# Altium PCB SENSEI_Base-Board.PcbDoc (part 2 of 10)
Units mm, origin at the board's own origin, x right, y up, seen from the top; angles counter-clockwise.
Board outline 51.6 x 28.1 mm, 8 copper layers (Top Sig/Pwr, GND1, Sig1, GND2, Sig2, Pwr, GND3, Bot Sig/Pwr), stack 1.53 mm thick; 209 components, 201 nets, 1031 pads, 2222 vias.
Unrouted connection lines stored in the file: 214.
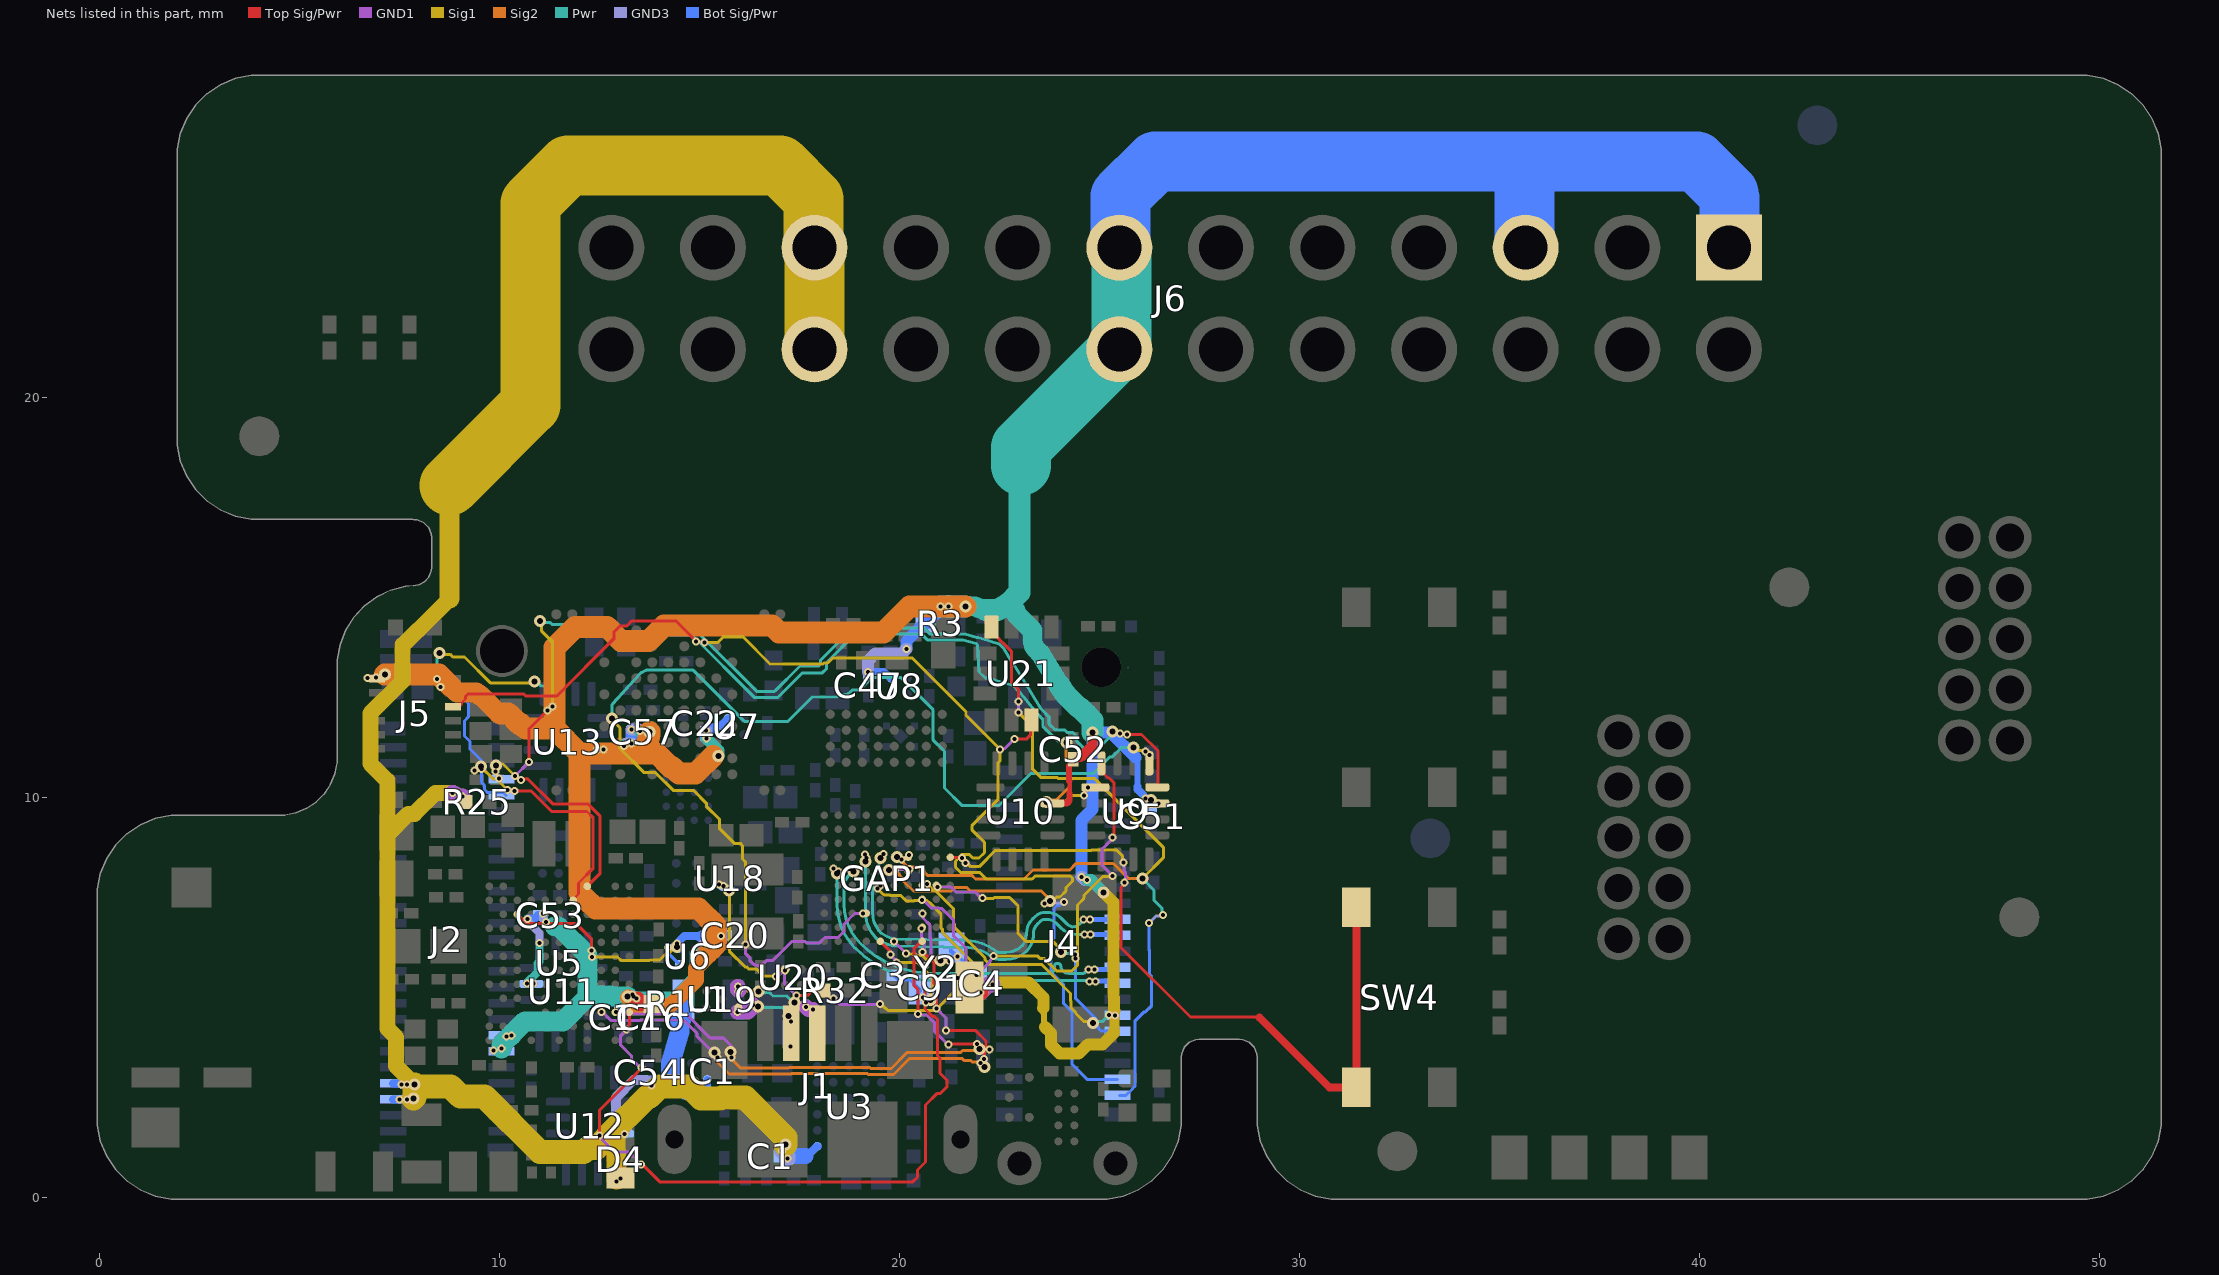
[diagram p8: the nets of this part, all layers, seen from the top]

## Footprints (in the part's own frame and the unit in brackets; to place one, negate y for a bottom-side part, rotate by r counter-clockwise, add the part's x,y. Pads: shape width x height; smd on the part's side, far side on the other; paste and mask are expansions set on the pad) (continued)
RESC0603X28X15LL05T05 [mm] "Chip Resistor, 2-Leads, Body 0.60x0.30mm, IPC High Density"
  rect 0.35x0.25 smd: 1(-0.275,0) 2(0.275,0)
  body extent -0.33,-0.17 0.32,0.18, height 0.28
RESC0603X28X15ML05T05 [mm] "Chip Resistor, 2-Leads, Body 0.60x0.30mm, IPC Low Density"
  rect 0.55x0.45 smd: 1(-0.375,0) 2(0.375,0)
  body extent -0.33,-0.17 0.33,0.18, height 0.28
RESC0603X28X15NL05T05 [mm] "Chip Resistor, 2-Leads, Body 0.60x0.30mm, IPC Medium Density"
  rect 0.45x0.35 smd: 1(-0.325,0) 2(0.325,0)
  body extent -0.33,-0.17 0.33,0.18, height 0.28
RESC1005X40X25LL05T10 [mm] "Chip Resistor, 2-Leads, Body 1.00x0.50mm, IPC High Density"
  rect 0.5x0.45 smd: 1(-0.375,0) 2(0.375,0)
  body extent -0.53,-0.27 0.53,0.28, height 0.4
RESC1608X55X30ML20T10 [mm] "Chip Resistor, 2-Leads, Body 1.60x0.80mm, IPC Low Density"
  rect 0.9x1.1 smd: 1(-0.75,0) 2(0.75,0)
  body extent -0.9,-0.5 0.9,0.5, height 0.55
SHDR24W64P254_2X12_3808X880X910P [mm]
  rect 1.65x1.65 hole 1.1: 1(0,0)
  round 1.65 hole 1.1: 2(0,2.54) 3(2.54,0) 4(2.54,2.54) 5(5.08,0) 6(5.08,2.54) 7(7.62,0) 8(7.62,2.54) 9(10.16,0) 10(10.16,2.54) 11(12.7,0) 12(12.7,2.54) 13(15.24,0) 14(15.24,2.54) 15(17.78,0) 16(17.78,2.54) 17(20.32,0) 18(20.32,2.54) 19(22.86,0) 20(22.86,2.54) 21(25.4,0) 22(25.4,2.54) 23(27.94,0) 24(27.94,2.54)
  body extent -5.07,-3.13 33.01,5.67, height 9.1
SML-LX0404SIUPGUSB [mm]
  rrect50% 0.45x0.45 smd: 1(-0.425,0.425)
  rect 0.45x0.45 smd: 2(0.425,0.425) 3(0.425,-0.425) 4(-0.425,-0.425)
  body extent -0.5,-0.5 0.5,0.5, height 0.25
SOT1226-3 [mm]
  rect 0.18x0.18 smd paste+0 mask+0: 1(-0.26,-0.35) 2(0.26,-0.35) 4(0.26,0.35) 5(-0.26,0.35)
  rect 0.28x0.28 smd rot 45 paste+0 mask+0: 3(0,0)
  Top Sig/Pwr region: 0.38,-0.48 0.38,-0.16 0.265,-0.16 0.12,-0.305 0.12,-0.48
  Top Sig/Pwr region: -0.38,0.48 -0.38,0.16 -0.265,0.16 -0.12,0.305 -0.12,0.48
  Top Sig/Pwr region: -0.38,-0.48 -0.38,-0.16 -0.265,-0.16 -0.12,-0.305 -0.12,-0.48
  Top Sig/Pwr region: 0.38,0.48 0.38,0.16 0.265,0.16 0.12,0.305 0.12,0.48
  body extent -0.4,-0.4 0.4,0.4, height 0.37
"SW4_PTS815 SJM 250 SMTR LFS_CNK" [mm]
  rect 0.991x0.711 smd paste+0 mask+0: 1(-2.25,1.075) 2(2.25,1.075) 3(-2.25,-1.075) 4(2.25,-1.075)
  silkscreen extent -2.32,-1.83 2.32,1.83, body extent -2.25,-1.6 2.25,1.6, height 2.51
TPD1E01B04DPYRQ1 [mm]
  rect 0.3x0.5 smd: 1(-0.35,0) 2(0.35,0)
  body extent -0.5,-0.3 0.5,0.3, height 0.55
TPP [mm]
  round 1 smd: 0(0,0)
WLCSP32_APS512XXN-OB9-WB [mm]
  round 0.23 smd mask-0.02: A1(-1.4,0.6) A2(-1,0.6) A3(-0.6,0.6) A4(-0.2,0.6) A5(0.2,0.6) A6(0.6,0.6) A7(1,0.6) A8(1.4,0.6) B1(-1.4,0.2) B2(-1,0.2) B3(-0.6,0.2) B4(-0.2,0.2) B5(0.2,0.2) B6(0.6,0.2) B7(1,0.2) B8(1.4,0.2) C1(-1.4,-0.2) C2(-1,-0.2) C3(-0.6,-0.2) C4(-0.2,-0.2) C5(0.2,-0.2) C6(0.6,-0.2) C7(1,-0.2) C8(1.4,-0.2) D1(-1.4,-0.6) D2(-1,-0.6) D3(-0.6,-0.6) D4(-0.2,-0.6) D5(0.2,-0.6) D6(0.6,-0.6) D7(1,-0.6) D8(1.4,-0.6)
  silkscreen extent -1.9,-1.4 1.9,1.4, body extent -1.85,-1.34 1.88,1.39, height 0.51
WLCSP_5_2-1-2_P0.4 [mm]
  round 0.2 smd paste+0 mask+0: A1(-0.4,-0.2) A2(-0.4,0.2) B1(0,0) C1(0.4,-0.2) C2(0.4,0.2)
  body extent -0.6,-0.38 0.6,0.38, height 0.57
WLCSP_8_P0.4 [mm]
  round 0.2 smd mask+0: A1(0,0) A2(0.4,0) B1(0,-0.4) B2(0.4,-0.4) C1(0,-0.8) C2(0.4,-0.8) D1(0,-1.2) D2(0.4,-1.2)
  body extent -0.3,-1.4 0.7,0.2, height 0.41
WLP_30_MAX77654 [mm]
  round 0.22 smd paste+0 mask+0: A1(0,0) A2(0.4,0) A3(0.8,0) A4(1.2,0) A5(1.6,0) A6(2,0) B1(0,-0.4) B2(0.4,-0.4) B3(0.8,-0.4) B4(1.2,-0.4) B5(1.6,-0.4) B6(2,-0.4) C1(0,-0.8) C2(0.4,-0.8) C3(0.8,-0.8) C4(1.2,-0.8) C5(1.6,-0.8) C6(2,-0.8) D1(0,-1.2) D2(0.4,-1.2) D3(0.8,-1.2) D4(1.2,-1.2) D5(1.6,-1.2) D6(2,-1.2) E1(0,-1.6) E2(0.4,-1.6) E3(0.8,-1.6) E4(1.2,-1.6) E5(1.6,-1.6) E6(2,-1.6)
  body extent -0.4,-1.97 2.4,0.37, height 0.51
XTAL_ECS-240-10-47Q-CES-TR [mm]
  rect 0.75x0.65 smd: 1(-0.525,-0.375) 2(0.525,-0.375) 3(0.525,0.375) 4(-0.525,0.375)
  body extent -0.8,-0.6 0.8,0.6, height 0.41
Y_ECX-1048 [mm]
  rect 0.52x0.47 smd: 1(-0.41,-0.335) 2(0.41,-0.335) 3(0.41,0.335) 4(-0.41,0.335)
  body extent -0.6,-0.5 0.6,0.5, height 0.3

## Part data
C1 C2: library part CMP-06035-019701-1, "Chip Multilayer Ceramic Capacitors for General Purpose, 0201, 4.7uF, X5R, 15%, 20%, 6.3V", Capacitance=4.7uF, Case Code (Imperial)=0201, Case Code (Metric)=0603, Dielectric=X5R, Max Operating Temperature=85°C, Min Operating Temperature=-55°C, Tolerance=20%, Voltage Rating=6.3V, Case/Package=0201, Length=0.024inch, Mount="Surface Mount", Packaging="Tape and Reel", Thickness=0.022inch, Voltage Rating (DC)=6.3V, Width=0.012inch
C3 C4: "No Description Available", Capacitance=20pF, Mfr_Name=Kemet, Copyright="Copyright (C) 2022 Ultra Librarian. All rights reserved.", Manufacturer_Part_Number=CBR02C200F5GAC, RefDes=RefDes, Type=DEV
C5 C6 C7 C12 C18 C20 C22 C23 C47 C51 C52 C53 C54 C57 C64 C65 C69 C70 C74 C84 C92 C95 C97: library part CMP-13271-003594-1, "Cap Ceramic 1uF 10V X5R ±10% Pad SMD 0201 +85°C T/R", Capacitance=1uF, Case Code (Imperial)=0201, Case Code (Metric)=0603, Max Operating Temperature=85°C, Min Operating Temperature=-55°C, Tolerance=10%, Voltage Rating=10V, Case/Package=0201, Length=0.024inch, Mount="Surface Mount", Packaging="Cut Tape", Thickness=0.013inch, Width=0.012inch
C8 C10 C24 C49 C55: library part CMP-2000-05437-2, "CAP CER 4.7UF 6.3V X5R 0402", Capacitance=4.7uF, Case/Package=0402, Dielectric=X5R, Dielectric Material=Ceramic, Max Operating Temperature=85°C, Min Operating Temperature=-55°C, Tolerance=10%, Voltage=6.3V, Depth=0.5mm, Height=0.5mm, Lead Free="Lead Free", Length=1mm, Mount="Surface Mount", RoHS Compliant=Yes, Series=C, Termination=SMD/SMT
C9 C11 C19 C21 C25 C26 C27 C28 C29 C30 C31 C33 C34 C35 C36 C37 C38 C39 C48 C50 C56 C58 C60 C61 C73 C75 C76 C77 C78 C79 C80 C81 C82 C85 C86 C88 C89 C90 C94 C96 C98 C99: library part CMP-06035-035508-1, "Chip Multilayer Ceramic Capacitors for General Purpose, 0201, 0.10uF, X7R, 15%, 10%, 16V", Capacitance=0.1uF, Case/Package=0201
C13 C14: library part CMP-06035-032992-1, "Chip Multilayer Ceramic Capacitors for General Purpose, 0201, 2.2uF, X5R, 15%, 10%, 10V", Capacitance=2.2uF, Case Code (Imperial)=0201, Case Code (Metric)=0603, Dielectric=X5R, Max Operating Temperature=85°C, Min Operating Temperature=-55°C, Tolerance=10%, Voltage Rating=10V, Case/Package=0201, Length=0.024inch, Mount="Surface Mount", Packaging="Tape and Reel", Thickness=0.015inch, Voltage Rating (DC)=10V, Width=0.012inch
C15 C16 C17 C40 C41 C42 C43: library part CMP-13271-000286-1, "Cap Ceramic 22uF 6.3V X5R ±20% SMD 0402 +85°C Paper T/R", Capacitance=22uF, Case Code (Imperial)=0402, Case Code (Metric)=1005, Max Operating Temperature=85°C, Min Operating Temperature=-55°C, Tolerance=20%, Voltage Rating=6.3V, Case/Package=0402, Length=0.039inch, Mount="Surface Mount", Packaging="Tape and Reel", Thickness=0.022inch, Width=0.02inch
C32 C44 C59 C83 C87: library part CMP-13271-000002-1, "CAP CER 10UF 10V X5R 0402", Capacitance=10uF, Manufacturer=Samsung, Temperature="-55°C to +85°C", Temperature Characteristic=X5R, Temperature Coefficient=15%, Temperature Range High=+85°C, Temperature Range Low=-55°C, Tolerance=20%, Voltage Rating=10V, Automotive=No, Category=Cap, ComponentLink2Description=Datasheet, ComponentLink2URL=http://www.samsungsem.com/kr/support/product-search/mlcc/__icsFiles/afieldfile/2019/05/10/19-CL05A106MP5NUNC.pdf, Device Class L1="Passive Components", Device Class L2=Capacitors, Device Class L3="Ceramic Capacitors", Digikey Description="CAP CER 10UF 10V X5R 0402", Height=0.7mm, Ipc Land Pattern Name=CAPC10050X50, Lead Free=Yes, Manufacturer Part Number=CL05A106MP5NUNC, Material=Ceramic, Octopart=https://octopart.com/cl05a106mp5nunc-samsung-22457395, Package=CL05A106MP5NUNC, RoHS=TRUE
C46: library part CMP-06035-035563-1, "Chip Multilayer Ceramic Capacitors for General Purpose, 0201, 3300pF, X7R, 15%, 10%, 25V", Capacitance=3.3nF, Case Code (Imperial)=0201, Case Code (Metric)=0603, Dielectric=X7R, Max Operating Temperature=125°C, Min Operating Temperature=-55°C, Package Quantity=15000, Resistor Type=Ceramic, Tolerance=10%, Voltage Rating=25V, Case/Package=0201, Height=0.3mm, Length=0.024inch, Mount="Surface Mount", Packaging="Tape and Reel", Termination=SMD/SMT, Thickness=0.013inch, Voltage Rating (DC)=25V, Weight=1.2E-05oz, Width=0.012inch
C62 C63: library part CMP-06035-019132-1, "Chip Multilayer Ceramic Capacitors for General Purpose, 0201, 110pF, C0G, 30ppm/°C, 5%, 50V", Capacitance=110pF, Case Code (Imperial)=0201, Case Code (Metric)=0603, Dielectric=C0G, Max Operating Temperature=125°C, Min Operating Temperature=-55°C, Package Quantity=1, Tolerance=5%, Voltage Rating=50V, Case/Package=0201, Height=0.3mm, Length=0.024inch, Mount="Surface Mount", Packaging="Tape and Reel", Termination=SMD/SMT, Thickness=0.013inch, Voltage Rating (DC)=50V, Weight=1.2E-05oz, Width=0.3mm
C66: library part CMP-2010-01694-2, "Chip Multilayer Ceramic Capacitors for General Purpose, 0201, 2200pF, X7R, 15%, 10%, 16V", Capacitance=2.2nF, Case Code (Imperial)=0201, Case Code (Metric)=0603, Dielectric=X7R, Max Operating Temperature=125°C, Min Operating Temperature=-55°C, Package Quantity=1, Tolerance=10%, Voltage=16V, Case/Package=0201, Depth=0.3mm, Height=0.3mm, Lead Free="Lead Free", Length=0.6mm, Material=Ceramic, Mount="Surface Mount", Packaging="Tape and Reel", Radiation Hardening=No, REACH SVHC="No SVHC", Termination=SMD/SMT, Thickness=0.013inch, Voltage Rating=16V, Voltage Rating (DC)=16V, Width=0.012inch
C67: library part CMP-2010-00919-2, "Ceramic Capacitor 0.7pF ±0.1pF 25V C0G 0201 (0603 Metric)", Capacitance=0.7pF, Case Code (Imperial)=0201, Case Code (Metric)=0603, Dielectric=C0G, Max Operating Temperature=125°C, Min Operating Temperature=-55°C, Package Quantity=15000, Voltage Rating=25V, Case/Package=0201, Depth=0.3mm, Height=0.3mm, Lead Free="Lead Free", Length=0.6mm, Mount="Surface Mount", Packaging="Tape and Reel", Radiation Hardening=No, Termination=SMD/SMT, Thickness=0.013inch, Voltage Rating (DC)=25V, Width=0.012inch
C68: library part CMP-06035-035508-1, Case/Package=0201, Capacitance=DNF
C71 C72: library part CMP-2000-05437-2, "CAP CER 4.7UF 6.3V X5R 0402 10%", Capacitance=4.7uF, Case/Package=0402, Dielectric=X5R, Dielectric Material=Ceramic, Max Operating Temperature=85°C, Min Operating Temperature=-55°C, Tolerance=10%, Voltage=6.3V, Depth=0.5mm, Height=0.5mm, Lead Free="Lead Free", Length=1mm, Mount="Surface Mount", RoHS Compliant=Yes, Series=C, Termination=SMD/SMT
C91: library part CMP-06035-033356-1, "Chip Multilayer Ceramic Capacitors for General Purpose, 0805, 100uF, X5R, 15%, 20%, 4V", Capacitance=100uF, Case Code (Imperial)=0805, Case Code (Metric)=2012, Dielectric=X5R, Max Operating Temperature=85°C, Min Operating Temperature=-55°C, Tolerance=20%, Voltage Rating=4V, Case/Package=0805, Length=0.079inch, Mount="Surface Mount", Packaging="Tape and Reel", Thickness=0.057inch, Voltage Rating (DC)=4V, Width=0.049inch
D1: library part D_RGB_LED, "SML-LX0404SIUPGUSB RGB LED", Manufacturer=Lumex, Supplier Part Number 1=696-LX0404SIUPGUSB, Manufacturer Part Number=SML-LX0404SIUPGUSB, Supplier 1=Mouser
D2 D3: "TVS Diode (Bi-directional)", Manufacturer_Name="Texas Instruments", Mouser Part Number=595-TPD1E01B04DPYRQ1, Arrow Part Number=TPD1E01B04DPYRQ1, Arrow Price/Stock=https://www.arrow.com/en/products/tpd1e01b04dpyrq1/texas-instruments?region=nac, Datasheet Link=https://www.ti.com/lit/ds/symlink/tpd1e01b04-q1.pdf?ts=1677834076075&ref_url=https%253A%252F%252Fwww.ti.com%252Fproduct%252FTPD1E01B04-Q1%252Fpart-details%252FTPD1E01B04DPYRQ1, Height=0.45mm, Manufacturer_Part_Number=TPD1E01B04DPYRQ1, Mouser Price/Stock=https://www.mouser.co.uk/ProductDetail/Texas-Instruments/TPD1E01B04DPYRQ1?qs=doiCPypUmgEwTnvBpZhkOw%3D%3D
D4: library part CMP-1055-00233-1, "Schottky Barrier Diode, 2-Pin DSN, Pb-Free, Tape and Reel", Manufacturer="On Semiconductor", ComponentLink1Description="Manufacturer URL", ComponentLink1URL=http://www.onsemi.com/, ComponentLink2Description=Datasheet, ComponentLink2URL=http://www.onsemi.com/pub_link/Collateral/NSR20F30-D.PDF, ComponentLink3Description="Package Specification", ComponentLink3URL=http://www.onsemi.cn/pub_link/Collateral/152AB.PDF, Configuration=Single, DatasheetVersion="Rev. 3", IFSM Max (A)=28, Mounting Technology="Surface Mount", PackageDescription="2-Pin Micro Molded Package, Body 1.6 x 0.8 mm", PackageReference=DSN-2-512AB-01, PackageVersion="Rev. B, 01/2011", Packing="Tape and Reel", PartNumber=NSR20F30NXT5G, RoHS=TRUE
E1: "Integrated Chip Antenna", Manufacturer="Fractus Antennas", Supplier Part Number 1=128-NN03-320, Manufacturer Part Number=NN03-320, Supplier 1=Mouser
IC1: library part MAX38643AENT+, "Integrated Circuit", Manufacturer_Name="Analog Devices", Mouser Part Number=700-MAX38643AENT+, Datasheet Link=https://www.mouser.com/datasheet/2/256/MAX38640A-MAX38643B-1516623.pdf, Height=0.5mm, Manufacturer_Part_Number=MAX38643AENT+, Mouser Price/Stock=https://www.mouser.co.uk/ProductDetail/Maxim-Integrated/MAX38643AENT%2b?qs=PzGy0jfpSMssjCGgbzOt4w%3D%3D
IC2: "Integrated Circuit", Manufacturer_Name="Texas Instruments", Mouser Part Number=595-TS5A3153YZPR, Datasheet Link=http://www.ti.com/lit/gpn/ts5a3153, Height=0.5mm, Manufacturer_Part_Number=TS5A3153YZPR, Mouser Price/Stock=https://www.mouser.co.uk/ProductDetail/Texas-Instruments/TS5A3153YZPR?qs=BBezV1N05%2FtCq%2FSrTOTYog%3D%3D
IC3: "Integrated Circuit", Manufacturer_Name="Texas Instruments", Mouser Part Number=595-TS5A3167YZPR, Arrow Part Number=TS5A3167YZPR, Arrow Price/Stock=https://www.arrow.com/en/products/ts5a3167yzpr/texas-instruments, Datasheet Link=http://www.ti.com/lit/gpn/ts5a3167, Height=0.5mm, Manufacturer_Part_Number=TS5A3167YZPR, Mouser Price/Stock=https://www.mouser.co.uk/ProductDetail/Texas-Instruments/TS5A3167YZPR/?qs=0O%2FZFlpUpJV2gM0iE3NeCQ%3D%3D
J1: "No Description Available", Mfr_Name="Global Connector Technology", Copyright="Copyright (C) 2023 Ultra Librarian. All rights reserved.", Manufacturer_Part_Number=USB3076-30-A, RefDes=RefDes, Type=DEV
J2: library part CONN_50P_M_COMBI_INTERFACE, "50Pin 0.4mm pitch connector footprint that accepts (male) connectors intended for different stacking heights: / Hirose - DF40C-50DP-0.4V(51) for 1.5mm - 3mm stacking height / JAE - WP7B-P050VA1-R8000 - for 0.7mm stacking height"
J3 J7: "Connector", Manufacturer_Name="CNC Tech", Arrow Part Number=3220-10-0100-00, Arrow Price/Stock=https://www.arrow.com/en/products/3220-10-0100-00/cnc-tech-llc?region=nac, Datasheet Link=https://datasheet.datasheetarchive.com/originals/dk/DKDS-7/133059.pdf, Height=5.6mm, Manufacturer_Part_Number=3220-10-0100-00
J4: "CONN PLUG 40POS SMD GOLD", Current Rating=300mA, Max Operating Temperature=85°C, Min Operating Temperature=-35°C, Package Quantity=1, Voltage Rating=30V, Connector Type=Plug, Contact Material=Bronze, Contact Plating=Gold, Gender=Male, Housing Material=Polymer, Lead Free="Lead Free", Mated Stacking Heights=4mm, Mount="Surface Mount", Number of Contacts=40, Number of Positions=40, Number of Rows=2, Orientation=Straight, Packaging="Tape and Reel", Pitch=0.4mm, REACH SVHC="No SVHC", Termination=SMD/SMT
J5: "Connector", Manufacturer_Name=Molex, Mouser Part Number=538-505066-1222, Datasheet Link=https://www.molex.com/pdm_docs/sd/5050661222_sd.pdf, Height=0.63mm, Manufacturer_Part_Number=505066-1222, Mouser Price/Stock=https://www.mouser.co.uk/ProductDetail/Molex/505066-1222?qs=byeeYqUIh0OlQo7UKX%2FsWw%3D%3D
J6: "Connector", Manufacturer_Name="Adam Tech", Arrow Part Number=BHR-24-VUA, Arrow Price/Stock=https://www.arrow.com/en/products/bhr-24-vua/adam-tech, Datasheet Link=https://datasheet.datasheetarchive.com/originals/distributors/Datasheets_SAMA/695a8166aa40898d0a6b5857fa89f6fe.pdf, Height=9.1mm, Manufacturer_Part_Number=BHR-24-VUA
J8: library part DF52-2S-0.8H_21_, "Connector", Manufacturer_Name=Hirose, Mouser Part Number=798-DF52-2S-0.8H21, Datasheet Link=https://datasheet.datasheetarchive.com/originals/distributors/DKDS-30/591726.pdf, Height=1mm, Manufacturer_Part_Number=DF52-2S-0.8H(21), Mouser Price/Stock=https://www.mouser.co.uk/ProductDetail/Hirose-Connector/DF52-2S-0.8H21?qs=%2FKR40Cd6GUpAHUMGMtWbig%3D%3D
L1: library part CMP-06042-016331-1, "FIXED IND 1UH 1.6A 144 MOHM SMD", Case Code (Imperial)=0603, Case Code (Metric)=1608, Current Rating=1.6A, DC Resistance (DCR)=144mR, Inductance=1uH, Max Operating Temperature=85°C, Min Operating Temperature=-40°C, Saturation Current=2A, Test Frequency=1MHz, Tolerance=20%, Case/Package=0603, Core Material=Metal, Mount="Surface Mount", Packaging="Cut Tape", RoHS Compliant=Yes, Shielding=Shielded
L2: library part L_0805_1.5uH_2A, "L 1.5uH 2A 0805", Inductance=1.5uH, Manufacturer=Murata, Manufacturer Part Number=DFE201210S-1R5M=P2, Supplier Part Number 1=81-DFE201210S-1R5MP2, Supplier 1=Mouser
L3 L10: library part CMP-06042-017052-1, "Multilayer type Inductor for Power Lines 10uH ±20% @1MHz, 300mA, Max DCR 1.365Ω, SRF 32MHz", Parameter 1=10uH
L4 L5: library part CMP-06042-003257-1, "Film type RF Inductor 2.2nH ±0.1nH 600mA 0.12Ω 0201 (0603)", Case Code (Imperial)=0201, Case Code (Metric)=0603, Current Rating=600mA, DC Resistance (DCR)=120mR, Inductance=2.2nH, Max Operating Temperature=125°C, Min Operating Temperature=-55°C, Resistor Type="Thin Film", Self Resonant Frequency=9GHz, Test Frequency=500MHz, Case/Package=0201, Core Material=Non-Magnetic, Mount="Surface Mount", Packaging="Tape and Reel", Shielding=Unshielded
L6: library part CMP-06042-000562-1, "Wire Wound RF Inductor 1.6nH ±0.2nH 1450mA 0.045Ω 0402 (1005)", Case Code (Imperial)=0402, Case Code (Metric)=1005, Current Rating=1.45A, DC Resistance (DCR)=45mR, Inductance=1.6nH, Max Operating Temperature=125°C, Min Operating Temperature=-55°C, Package Quantity=10000, Resistor Type=Wirewound, Self Resonant Frequency=18GHz, Test Frequency=100MHz, Case/Package=0402, Core Material=Ferrite, Height=0.5mm, Height - Seated (Max)=0.024inch, Length=0.039inch, Max DC Current=1.45A, Mount="Surface Mount", Packaging="Tape and Reel", Q Factor=20, Shielding=Unshielded, Termination=SMD/SMT, Width=0.5mm
L7: library part CMP-06042-006199-1, "Shielded Wirewound Inductor 4.7uH 20% 1100mA 0.288Ω 0806 (2016)"
L8: library part CMP-06042-011997-1, "Wire Wound RF Inductor 4.2nH ±2% 2200mA 0.028Ω 0603 (1608)", Inductance=4.2nH
L9: library part CMP-06042-015179-1, "Wire Wound RF Inductor 7.5nH ±2% 1500mA 0.048Ω 0603 (1608)", Inductance=7.5nH
MIC1: "No Description Available", Mfr_Name=InvenSense, Copyright="Copyright (C) 2023 Ultra Librarian. All rights reserved.", Manufacturer_Part_Number=MMICT5838-00-012, RefDes=RefDes, Type=DEV
R1 R3 R5 R8 R10: library part CMP-2002-03047-1, Manufacturer="Vishay Dale", Tolerance=1%, Part Number=CRCW04021R00FKEDHP
R2: library part CMP-2004-00289-1, Manufacturer="Vishay Dale", Resistance=20k, Part Number=CRCW020120K0FKED
R4 R36 R37 R38 R40 R42 R43 R49 R50: library part CMP-2004-00982-1, Manufacturer="Vishay Dale", Part Number=CRCW0201220RFKED
R6 R7: library part CMP-1010-00642-1, "100K 0.05W 1% 0201 (0603 Metric)  SMD", Case-EIA=0201, Case-Metric=0603, Power="0.05 W", Tolerance="1 %", Technology=SMT
R9 R24 R26 R27 R28 R29 R31: library part CMP-26527-002755-1, "RES 10K OHM 1% 1/20W 0201", Case Code (Imperial)=0201, Case Code (Metric)=0603, Max Operating Temperature=125°C, Max Power Dissipation=50mW, Min Operating Temperature=-55°C, Resistance=10k, Resistor Type="Thick Film", Temperature Coefficient=200ppm/°C, Tolerance=1%, Case/Package=0201, Contact Plating=Tin, Height=0.009inch, Length=0.024inch, Mount="Surface Mount", Number of Terminations=2, Packaging="Tape and Reel", Power Rating=50mW, RoHS Compliant=Yes, Series=RMCF, Width=0.012inch
R11 R12 R13 R17 R32: library part CMP-1010-00146-1, "1M 0.05W 5% 0201 (0603 Metric)  SMD", Case-EIA=0201, Case-Metric=0603, Power="0.05 W", Tolerance="5 %", Technology=SMT
R14 R15: library part CMP-2002-01533-2, "100kΩ ±0.5% 0.0625W 1/16W Chip Resistor 0402 (1005 Metric) Thin Film", Case Code (Imperial)=0402, Case Code (Metric)=1005, Max Operating Temperature=125°C, Max Power Dissipation=63mW, Min Operating Temperature=-55°C, Package Quantity=1, Resistance=100k, Resistance Tolerance=0.5%, Resistor Type="Thin Film", Temperature Coefficient=25ppm/°C, Voltage Rating=25V, Case/Package=0402, Height=0.016inch, Lead Free="Lead Free", Length=0.039inch, Number of Pins=2, Number of Terminations=2, Packaging="Tape and Reel", Power Rating=63mW, REACH SVHC="No SVHC", RoHS Compliant=Yes, Series=RR, Technology="THIN FILM", Termination=SMD/SMT, Tolerance=0.5%, Voltage Rating (DC)=25V, Width=0.02inch, Working Voltage=25V
R16: library part "RES DNM", "Resistor"
R19 R20: library part CMP-2004-03369-1, Manufacturer=Panasonic, Resistance=500, Part Number=ERJ-1GNF4990C
R21 R30: library part CMP-26527-001890-1
R22: library part CMP-1010-00642-1, "100K 0.05W 1% 0201 (0603 Metric)  SMD", Case-EIA=0201, Case-Metric=0603, Power="0.05 W", Resistance=100k, Tolerance="1 %", Technology=SMT
R23: library part CMP-26527-001890-1, "0Ω ±0 0.05W 0201 Thick Film Chip Resistor AEC-Q200 compliant", Case Code (Imperial)=0201, Case Code (Metric)=0603, Max Operating Temperature=125°C, Max Power Dissipation=50mW, Min Operating Temperature=-55°C, Package Quantity=10000, Resistance=0Ohm, Resistor Type="Thick Film", Case/Package=0201, Contact Plating=Tin, Height=0.009inch, Height - Seated (Max)=0.01inch, Lead Free="Lead Free", Length=0.024inch, Mount="Surface Mount", Number of Terminations=2, Packaging="Tape and Reel", Power Rating=50mW, Radiation Hardening=No, RoHS Compliant=Yes, Series=RMCF, Width=0.012inch
R25: library part CMP-1010-00176-1, "2R2 0.05W 1% 0201 (0603 Metric)  SMD", Case-EIA=0201, Case-Metric=0603, Power="0.05 W", Tolerance="1 %", Technology=SMT
R33 R34: library part CMP-26527-007617-1, "RES 0 OHM JUMPER 1/16W 0402", Case Code (Imperial)=0402, Case Code (Metric)=1005, Current Rating=1A, Max Operating Temperature=155°C, Max Power Dissipation=63mW, Min Operating Temperature=-55°C, Resistance=0R, Resistor Type="Thick Film", Working Voltage=50V, Case/Package=0402, Construction=Rectangular, Contact Plating=Tin, Depth=0.5mm, Features="Automotive AEC-Q200", Height=0.016inch, Lead Free="Lead Free", Length=0.039inch, Military Standard=Not, Mount="Surface Mount", Number of Terminations=2, Packaging="Tape and Reel", Power Rating=63mW, Radiation Hardening=No, RoHS Compliant=Yes, Series=RMCF, Technology="THICK FILM", Width=0.02inch
R35 R44 R45 R46 R47 R48: library part CMP-2004-00655-1, Manufacturer="Vishay Dale", Resistance=49.9, Part Number=CRCW020149R9FNED
R39: library part CMP-2000-01007-1, Manufacturer="KOA Speer", Resistance=5.6k, Part Number=RK73B1JTTD562J
R41: library part CMP-2000-01007-1, Manufacturer="KOA Speer", Part Number=RK73B1JTTD562J, Resistance=DNM
RT1: "Thermistor", Manufacturer_Name=Panasonic, Mouser Part Number=667-ERT-JZEG103FA, Arrow Part Number=ERT-JZEG103FA, Arrow Price/Stock=https://www.arrow.com/en/products/ert-jzeg103fa/panasonic?region=nac, Datasheet Link=https://industrial.panasonic.com/cdbs/www-data/pdf/AUA0000/AUA0000C8.pdf, Height=0.33mm, Manufacturer_Part_Number=ERT-JZEG103FA, Mouser Price/Stock=https://www.mouser.co.uk/ProductDetail/Panasonic/ERT-JZEG103FA?qs=8rMlxy%252BA7jnazXT5AW8efg%3D%3D
S1: "Switch", Manufacturer_Name=LITTELFUSE, Datasheet Link=https://www.ckswitches.com/media/2866/nanot.pdf, Height=1mm, Manufacturer_Part_Number=NanoT160BP
SW3 SW4: "No Description Available", Mfr_Name="C&K Components", Copyright="Copyright (C) 2023 Ultra Librarian. All rights reserved.", Manufacturer_Part_Number="PTS815 SJM 250 SMTR LFS", RefDes=RefDes, Type=DEV
U1: "Macronix 512 Mbit WLCSP Flash"
U2: "512 Mbit octal SPI PSRAM APmemory", Mfr_Name="AP Memory", Copyright="Copyright (C) 2022 Ultra Librarian. All rights reserved.", Manufacturer_Part_Number=APS512XXN-OB9-WB, RefDes=RefDes, Type=DEV
U3: "Buck-Boost Converter With LDO Regulator 5-OUT 30-Pin WLP T/R", Manufacturer=Maxim, Supplier Part Number 1=700-MAX77654BENV+T, Manufacturer Part Number=MAX77654BENV+T, Supplier 1=Mouser
U4 U6 U7 U8 U18 U20: "Integrated Circuit", Manufacturer_Name="Texas Instruments", Mouser Part Number=595-TPS22916CYFPR, Arrow Part Number=TPS22916CYFPR, Arrow Price/Stock=https://www.arrow.com/en/products/tps22916cyfpr/texas-instruments?region=nac, Datasheet Link=http://www.ti.com/lit/gpn/tps22916, Height=0.5mm, Manufacturer_Part_Number=TPS22916CYFPR, Mouser Price/Stock=https://www.mouser.co.uk/ProductDetail/Texas-Instruments/TPS22916CYFPR?qs=EU6FO9ffTweddKR4NsfVQg%3D%3D
U5: library part nRF5340-CLAA, "Multi-protocol Bluetooth Low Energy, IEEE 802.15.4, ANT and 2.4GHz proprietary system-on-chip", Manufacturer=Nordic, Supplier Part Number 1=949-NRF5340-CLAA-R7, Manufacturer Part Number=NRF5340-CLAA-R7, Supplier 1=Mouser
U9 U10 U11 U12 U13: library part CMP-04892-000017-1, "IC SWITCH", Ambient Temperature Range High=+125°C, Ambient Temperature Range Low=-40°C, Manufacturer="Texas Instruments", Max Junction Temp=+150°C, Max Supply Voltage=5.5V, Min Supply Voltage=1.08V, Nominal Supply Current=0.008uA, On State Resistance=2Ω, Package=RSV0016A, Temperature="-40°C to +125°C", -3Db Bandwith=300MHz, Automotive=No, Category=IC, ComponentLink2Description=Datasheet, ComponentLink2URL=http://www.ti.com/lit/ds/symlink/tmux1111.pdf, Device Class L1="Integrated Circuits (ICs)", Device Class L2="Interface ICs", Device Class L3="Analog Switches", Digikey Description="IC SWITCH", Height=0.55mm, Interface=LVCMOS, Lead Free=Yes, Manufacturer Part Number=TMUX1112RSVR, Mux Demux Ratio=1:1, Number of Circuits=4, Octopart=https://octopart.com/tmux1112rsvr-texas+instruments-99389231, RoHS=TRUE, Standoff Height=0mm, Temperature Range High=+125°C, Temperature Range Low=-40°C, Throw Configuration=SPST
U15: library part IS31FL3194, "LED Driver with Programmable Pattern Sequencing 3-Channel 40mA 8-Pin WCSP T/R", Manufacturer=ISSI, Supplier Part Number 1=2521-IS31FL3194-CLS2-TRCT-ND, Manufacturer Part Number=IS31FL3194-CLS2-TR, Supplier 1=Digi-Key
U17: "QSPI PSRAM in WLCSP package / 144 MHz / 128 Mbit", Mfr_Name="AP Memory", Manufacturer_Part_Number=APS12804O-SQRH-WA
U19: library part PESD1USB30, "ESD Suppressor Diode TVS Uni-Dir 5V 5-Pin WLCSP T/R", Manufacturer="NXP Semiconductors", Supplier Part Number 1=771-PESD1USB30Z, Manufacturer Part Number=PESD1USB30, Supplier 1=Mouser
U21: library part CMP-00355-129901550-1, "LSM6DSV16BXTR Inemo Inertial Module, 3.6V, Smd, Mems Module FunctionTri-Axis Gyroscope", Max Operating Temperature=85°C, Max Supply Voltage=3.6V, Min Operating Temperature=-40°C, Min Supply Voltage=1.08V, Operating Supply Current=950µA, Height=740µm, NexarPartId=129901550
Y2: "24MHz Â±10ppm Crystal 10pF 150 Ohms 4-SMD, No Lead", Frequency=24MHz, Package="SMD-4 ECS International", Availability=Unavailable, MF="ECS Inc.", MP=ECS-240-10-47Q-CES-TR, Price=None, SnapEDA_Link=https://www.snapeda.com/parts/ECS-240-10-47Q-CES-TR/ECS%20Inc./view-part/4221464/?ref=snap
Y3: library part Y_ECS-320-7-48B-JTM-TR5, "Crystal 32MHz 7pF ±20ppm ±20ppm 4-Pin Ultraminiature CSMD T/R", Manufacturer="ECS International", Supplier Part Number 1=520-ECS320748BJTMTR5, Manufacturer Part Number=ECS-320-7-48B-JTM-TR5, Supplier 1=Mouser
Y4: library part CMP-40224-000031-1, "CRYSTAL 32.7680KHZ 9PF SMD", Case/Package=SMD/SMT, ESR (Equivalent Series Resistance)=90kR, Frequency=32.768kHz, Frequency Tolerance=20ppm, Load Capacitance=9pF, Max Operating Temperature=85°C, Min Operating Temperature=-40°C, Mount="Surface Mount", Packaging="Tape and Reel", RoHS Compliant=Yes

## Free pads (board coordinates)
  round 1.3 hole 1.1: 1(10.064,13.658)

## Via types
v1: diameter 0.2, hole 0.1, Top Sig/Pwr to GND1, 544 vias
v2: diameter 0.2, hole 0.1, GND3 to Bot Sig/Pwr, 436 vias
v3: diameter 0.2, hole 0.1, GND1 to Sig1, 385 vias
v4: diameter 0.3, hole 0.15, Sig1 to Pwr, 293 vias
v5: diameter 0.3, hole 0.15, Top Sig/Pwr to Bot Sig/Pwr, tented both sides, 284 vias
v6: diameter 0.2, hole 0.1, Pwr to GND3, 280 vias

## Nets (pads, with @x,y where several pads share a name; then routed paths per layer and width w, separated by ;. In a path a pad name is that pad's centre, name@x,y a point inside that pad or via, vN(x,y) a via of type N, cw(c..) or ccw(c..) an arc to the next point about the centre after c; other vN are vias at no path point)
1V8: C16.1 C17.1 C20.1 C22.1 C47.1 C51.1 C52.1 C53.1 C54.1 C57.1 C91.1 IC1.B2 J2.6 J2.7 J5.1 J6.1 J6.5 J6.13 J6.14 L1.2 R1.1 R3.1 U6.A2 U7.A2 U8.A2 U9.11 U10.11 U11.11 U12.11 U13.11 | length 120.5
  Top Sig/Pwr w0.12: 24.25,10.103 24.25,10.113 24.26,10.123 24.26,10.407 24.27,10.416
  Top Sig/Pwr w0.15: 24.211,9.878 24.25,9.917 24.25,10.103 ; 24.243,10.408 24.243,10.601 24.244,10.794 C52.1@24.35,10.9
  Top Sig/Pwr w0.18: v1@6.71,12.986 J5.1@6.818,12.986 ; U10.11@23.825,9.85 23.835,9.86 24.193,9.86 24.211,9.878
  Top Sig/Pwr w0.2: v1(26.25,9.85) U9.11@26.45,9.85
  Top Sig/Pwr w0.25: C52.1@24.35,10.9 24.35,10.946 24.406,11.002 24.535,11.002 24.825,11.293 24.825,11.616 v5(24.835,11.626)
  Top Sig/Pwr w0.4: v1@13.451,4.947 13.54,4.858 13.824,4.858 R1.1@13.849,4.833 ; C91.1@21.75,5.25 21.883,5.117 v1(22.025,5.117)
  GND1 w0.18: v1(6.709,12.986) 6.913,12.986 v3(6.918,12.99)
  GND1 w0.2: v3(13.325,5.075) v1(13.425,4.975) ; v1(26.25,9.85) v3(26.475,9.85)
  GND1 w0.4: v1(22.025,5.117) 22.233,5.325 v3(22.325,5.325)
  Sig2 w0.4: v4@13.219,5 13.439,4.78 14.266,4.78 14.916,5.43 14.916,5.722 15.253,6.059 15.253,6.165
  Sig2 w0.5: 8.774,12.785 8.945,12.615 9.43,12.615 9.483,12.562 9.518,12.562 9.986,12.095 10.029,12.095
  Sig2 w0.55: v4(7.138,13.066) 8.493,13.066 8.774,12.785 ; 10.029,12.095 10.233,12.095 10.493,11.835 10.538,11.835 10.653,11.719 11.378,11.719 ; v4(13.753,11.632) 13.752,11.591 cw(c13.202,11.607) 13.592,11.219 13.471,11.098 ; 15.253,6.165 15.416,6.329 15.416,6.785 14.976,7.225 12.407,7.225 12.316,7.316 12.307,7.316 12,7.623 12,11.098 ; v4@15.346,11.034 14.901,10.59 14.487,10.59 14.318,10.759 14.273,10.759 13.933,11.098 13.471,11.098 ; v4(21.656,14.775) 20.261,14.775 19.611,14.125 16.993,14.125 16.822,14.296 14.124,14.296 13.732,13.904 13.048,13.904 12.696,14.256 11.896,14.256 11.378,13.739 11.378,11.719 ; 11.378,11.719 12,11.098 ; 12,11.098 13.471,11.098
  GND3 w0.18: v2(12.445,11.2) 12.446,11.198 12.6,11.198 v6(12.601,11.197)
  GND3 w0.2: v2(9.861,3.669) 9.994,3.669 v6(10.051,3.726) ; v2(10.175,4.025) 10.2,4.05 v6(10.3,4.05) ; v6(10.692,5.349) 10.852,5.349 v2(10.856,5.345) ; v2(10.7,6.963) 10.7,6.907 11.001,6.606 v6(11.001,6.353) ; v2@11.097,7.027 11.097,6.959 v6(11.171,6.885) ; v2(13.175,5.025) 13.18,5.02 v6(13.353,5.02) ; v6(26.15,9.969) 26.269,9.85 26.275,9.85 v2(26.3,9.825)
  GND3 w0.25: v2(13.126,1.581) 12.921,1.786 12.921,2.499 13.352,2.93 13.67,2.93 v2(13.8,2.8)
  GND3 w0.3: v6(13.112,11.284) 13.179,11.35 v2(13.3,11.35) ; v2(13.3,11.7) 13.478,11.7 v6(13.524,11.654) ; v6(14.902,6.101) 15.33,6.529 v2(15.548,6.529) ; v2(15.17,11.668) 15.17,11.48 v6(15.183,11.467) ; v2(19.222,13.136) 19.222,13.42 19.402,13.599 20.068,13.599 v2(20.175,13.707) ; v2(24.55,8.013) 24.636,7.926 v6(24.696,7.926)
  GND3 w0.55: v2(21.025,14.775) v6(21.225,14.775)
  Sig1 w0.15: 23.599,4.732 23.599,4.625 23.612,4.612 23.612,4.288 23.642,4.258
  Sig1 w0.18: v3(6.918,12.99) 6.921,12.994 7.033,12.994 7.105,13.066 v4(7.138,13.066)
  Sig1 w0.2: v4(13.2,5.025) 13.219,5.044 13.294,5.044 v3(13.325,5.075) ; v4(26.286,9.935) 26.313,9.935 26.398,9.85 v3(26.475,9.85)
  Sig1 w0.25: 25.362,4.15 25.375,4.163 25.375,4.675
  Sig1 w0.3: v3(22.325,5.325) 22.369,5.369 23.231,5.369 23.6,5 23.6,4.733 23.599,4.732 ; 23.642,4.258 23.795,4.105 23.795,3.807 24.007,3.594 24.486,3.594 24.717,3.826 25.083,3.826 25.362,4.105 25.362,4.15 ; v4@25.1,7.625 v4(25.103,7.623) 25.35,7.375 25.35,5.024 25.374,5 25.374,4.676 25.375,4.675
  Pwr w0.2: v6(10.692,5.349) 10.692,5.366 10.953,5.628 10.953,5.848 11.001,5.896 v6(11.001,6.353) ; v6(11.171,6.885) 11.284,6.772 11.396,6.772 ; v4(13.2,5.025) 13.205,5.02 v6(13.353,5.02) ; v6(26.15,9.969) 26.165,9.954 26.267,9.954 v4(26.286,9.935)
  Pwr w0.3: v6(12.601,11.197) 12.973,11.197 13.06,11.284 v6(13.112,11.284) ; v6(13.353,5.02) 13.374,4.999 14.384,4.999 14.902,5.517 v6(14.902,6.101) ; v6(13.524,11.654) v4(13.753,11.632) ; v6(15.183,11.467) 15.485,11.166 v4(15.485,11.028) ; v6(24.696,7.926) 24.802,7.926 25.103,7.625 v4(25.103,7.623)
  Pwr w0.5: v6(10.051,3.726) 10.051,3.812 v6@10.253,4.014 ; v6(10.3,4.05) 10.3,4.061 10.639,4.4 11.596,4.4 12.205,5.009 ; 11.396,6.772 11.481,6.772 12.205,6.048 12.205,5.009 ; v4(13.2,5.025) 12.81,5.025 12.79,5.045 12.241,5.045 12.205,5.009 ; v4(21.656,14.775) cw(c21.728,14.28) 21.743,14.78 21.889,14.775 21.955,14.74 22.153,14.683 ; 22.9,14.675 22.9,14.6 23.325,14.175 23.325,14.006 23.333,13.94 23.35,13.804 23.419,13.705 23.515,13.609 23.992,12.823
  Pwr w0.55: v6(21.225,14.775) v4@21.625,14.775 ; 22.153,14.683 22.458,14.683 22.72,14.841 23,15.121 23,18.25 23.048,18.298 ; 23.992,12.823 24.138,12.59 24.439,12.288 24.555,12.2 24.617,12.138 cw(c24.285,11.699) 24.683,12.078 24.835,11.92 v5(24.835,11.626)
  Pwr w1.5: 23.048,18.298 23.048,18.748 25.479,21.179 25.529,21.179 25.55,21.2 J6.13@25.55,23.74
  Bot Sig/Pwr w0.15: 25.955,10.986 25.96,10.981 25.96,10.273
  Bot Sig/Pwr w0.18: v2(12.445,11.2) 12.495,11.2 U13.11@12.51,11.184 ; IC1.B2@15.198,2.945 15.207,2.936 15.207,2.758 15.213,2.752 15.213,2.61 ; 15.289,11.707 15.349,11.767 15.4,11.767 15.402,11.769 15.501,11.762 15.707,11.968 U7.A2@15.719,11.968 ; C47.1@19.193,13.189 19.238,13.145 19.617,13.145 19.788,12.975 U8.A2@19.8,12.975
  Bot Sig/Pwr w0.2: v2(9.861,3.669) 9.861,3.66 9.871,3.65 J2.6@10.055,3.65 ; J2.7@10.055,4.05 10.15,4.05 v2(10.175,4.025) ; v2(10.7,6.963) 10.702,6.965 10.891,6.965 10.972,7.046 C53.1@10.966,7.053 ; C17.1@13.1,4.875 13.1,4.95 v2(13.175,5.025) ; U6.A2@14.5,6.225 14.501,6.226 14.501,6.408 14.631,6.538 14.987,6.538 15,6.525 ; 25.912,11.035 25.955,10.991 25.955,10.986 ; 25.96,10.273 25.96,10.192 C51.1@26.275,9.877 ; C51.1@26.275,9.891 C51.1@26.275,9.877 ; C51.1@26.291,9.861 C51.1@26.275,9.877
  Bot Sig/Pwr w0.25: 15,6.525 15.075,6.525 15.1,6.55
  Bot Sig/Pwr w0.3: v2(13.3,11.35) C57.1@13.3,11.634 ; C57.1@13.3,11.635 v2(13.3,11.7) ; 15.1,6.55 C20.1@15.568,6.55 ; C22.1@15.119,11.59 C22.1@15.15,11.621 ; C22.1@15.15,11.55 C22.1@15.15,11.6 C22.1@15.15,11.621 ; v2(15.17,11.668) 15.15,11.647 C22.1@15.15,11.621 ; 15.289,11.707 15.261,11.707 15.181,11.627 15.156,11.627 C22.1@15.15,11.621 ; v2(15.548,6.529) C20.1@15.568,6.55 ; C20.1@15.596,6.55 C20.1@15.568,6.55 ; v2(20.175,13.707) 20.175,13.9 20.55,14.275 20.575,14.275 R3.1@20.65,14.35 20.675,14.35 20.925,14.6 20.925,14.675 v2(21.025,14.775) ; v2(24.55,8.013) 24.55,9.421 24.735,9.606 24.835,9.706 v5(24.835,11.626) 25.277,11.626 25.905,10.998
  Bot Sig/Pwr w0.33: v2(13.8,2.8) 13.775,2.825 13.775,2.861 13.779,2.86 13.806,2.858 13.92,2.847 14.014,2.838 14.287,2.838 14.309,2.816 14.404,2.816 14.442,2.816 14.656,2.602 15.205,2.602 15.213,2.61
  Bot Sig/Pwr w0.4: C17.1@13.061,4.849 C17.1@13.219,4.849 ; C17.1@13.219,5 C17.1@13.219,4.849 ; L1.2@14.425,4.975 14.425,4.924 14.35,4.849 C17.1@13.219,4.849
  Bot Sig/Pwr w0.48: 14.287,2.838 14.287,3.368 14.327,3.49 14.511,4.139 14.511,4.404 14.565,4.458 14.565,4.915 L1.2@14.6,4.95
  Bot Sig/Pwr w1.5: J6.13@25.5,23.74 25.529,23.769 25.529,25.021 26.407,25.9 39.925,25.9 40.728,25.097 ; 35.5,25.875 35.631,25.744 35.631,23.769 J6.5@35.66,23.74 ; J6.1@40.665,23.815 J6.1@40.74,23.74 40.75,23.75 40.75,24.975
  other v2: 11.094,7.098
ADS_A_DR: J2.22 U5.G11 U9.1 | length 34
  Top Sig/Pwr w0.075: v1(10.378,10.162) 10.795,10.162 11.31,9.646 12.192,9.646 12.346,9.492 12.346,8.223 11.978,7.855 11.978,7.582 11.85,7.454 U5.G11@11.85,7.425
  GND1 w0.075: v3(10.203,10.184) 10.215,10.173 10.367,10.173 v1(10.378,10.162) ; v3(24.614,10.042) 24.614,10.075 24.699,10.16 24.699,10.226 v1(24.723,10.25)
  Sig2 w0.075: v4(23.679,9.885) 23.722,9.928 23.918,9.928 24.278,10.288 24.278,10.837 24.172,10.943 24.172,11.361 v4(24.175,11.364)
  GND3 w0.075: v6(8.442,12.962) 8.466,12.938 8.466,12.849 8.525,12.79 v2(8.525,12.756) ; v6(9.375,10.674) 9.389,10.688 9.54,10.688 v2(9.554,10.702)
  Sig1 w0.075: v4(8.51,13.602) 8.538,13.574 8.772,13.574 8.836,13.51 9.128,13.51 9.776,12.862 10.85,12.862 v4(10.878,12.891) ; v4(9.538,10.766) 9.846,10.458 9.929,10.458 v3(10.203,10.184) ; v4(23.679,9.885) 23.702,9.862 24.118,9.862 24.297,10.042 v3(24.614,10.042)
  Pwr w0.075: v6(8.442,12.962) 8.442,13.474 8.51,13.542 v4(8.51,13.602) ; v6(9.375,10.674) 9.409,10.674 9.501,10.766 v4(9.538,10.766) ; v4(10.878,12.891) 10.939,12.891 11.052,12.778 11.122,12.778 11.275,12.931 11.275,13.375 11.919,14.019 12.631,14.019 12.978,13.672 13.77,13.672 14.156,14.059 14.815,14.059 16.373,12.501 16.968,12.501 17.58,13.113 18.077,13.113 18.185,13.221 18.185,13.373 18.9,14.088 19.196,14.088 19.662,14.087 20.549,14.088 20.699,13.937 21.576,13.937 cw(c21.576,13.862) 21.595,13.935 21.916,13.848 21.94,13.825 21.951,13.809 21.987,13.141 22.008,13.121 22.141,12.987 22.208,12.987 22.84,12.795 22.994,12.641 23.426,12.117 23.432,12.111 23.589,11.954 23.589,11.778 23.959,11.407 24.132,11.407 v4(24.175,11.364)
  Bot Sig/Pwr w0.075: v2(8.525,12.756) 8.53,12.756 8.765,12.521 9.059,12.521 9.232,12.347 9.232,12.01 9.132,11.909 9.132,11.534 9.268,11.398 9.268,11.205 9.554,10.919 v2(9.554,10.702) 9.554,10.378 9.612,10.32 9.612,10.293 9.626,10.279 9.626,10.194 9.697,10.122 10.094,10.122 J2.22@10.166,10.051
ADS_A_DR_GAP: GAP1.E5 U9.16 | length 12.8
  Top Sig/Pwr w0.075: U9.16@25.039,10.898 25.039,10.661 25.219,10.481 25.249,10.481 25.363,10.367 25.363,9.055 25.33,9.023 v1(25.33,8.989)
  GND1 w0.075: v3(19.451,7.718) v1(19.534,7.799) ; v3(21.935,5.557) 21.938,5.557 22.274,5.893 22.274,5.921 22.351,5.998 v3(22.351,6.027) ; v1(25.33,8.989) 25.33,8.962 25.063,8.694 25.063,8.307 v3(25.332,8.037)
  Sig1 w0.075: v3(19.451,7.718) 19.594,7.58 ccw(c19.646,7.634) 19.646,7.559 19.765,7.559 19.784,7.541 20.043,7.541 20.171,7.412 20.363,7.412 20.376,7.425 20.68,7.425 20.737,7.369 20.758,7.369 21.037,7.09 21.037,6.74 21.076,6.702 21.076,6.629 21.842,5.862 21.842,5.684 21.935,5.591 v3(21.935,5.557) ; v3(22.351,6.027) 23.464,6.027 23.527,5.965 23.627,5.965 23.929,5.662 24.315,5.662 24.453,5.8 24.453,7.309 24.622,7.478 24.622,7.558 25.08,8.016 25.311,8.016 v3(25.332,8.037)
ADS_B_DR: J2.23 U5.H12 U9.12 | length 30.1
  Top Sig/Pwr w0.075: v1(10.538,10.434) 10.562,10.458 10.687,10.458 10.699,10.47 11.333,9.836 12.214,9.836 12.512,9.538 12.512,8.087 U5.H12@12.2,7.775 ; v1(10.741,10.877) 10.741,11.712 v1(11.203,12.174) ; v1(25.691,11.572) 26.057,11.572 26.466,11.163 U9.12@26.466,10.238
  GND1 w0.075: v1(10.538,10.434) 10.536,10.434 10.462,10.508 10.415,10.508 v3(10.391,10.532) 10.394,10.532 10.739,10.877 v1(10.741,10.877) ; v1(11.203,12.174) 11.303,12.274 v3(11.335,12.274) ; v3(25.519,11.597) 25.531,11.585 25.679,11.585 v1(25.691,11.572)
  GND3 w0.075: v6(9.908,10.647) 9.931,10.623 9.931,10.562 9.99,10.504 v2(9.99,10.47)
  Sig1 w0.075: v4(9.912,10.795) 9.949,10.832 10.092,10.832 v3(10.391,10.532) ; v4(11.015,14.41) 11.058,14.367 11.058,14.151 11.335,13.875 v3(11.335,12.274) ; v4(25.335,11.645) 25.359,11.621 25.495,11.621 v3(25.519,11.597)
  Pwr w0.075: v6(9.908,10.647) 9.908,10.791 v4(9.912,10.795) ; v4(11.015,14.41) 11.058,14.367 11.274,14.367 11.315,14.325 12.537,14.325 13.04,13.822 13.707,13.822 14.094,14.209 14.877,14.209 16.435,12.651 16.885,12.651 17.519,13.285 17.988,13.285 18.035,13.331 18.035,13.435 18.838,14.238 19.258,14.238 19.6,14.237 20.611,14.238 20.761,14.087 21.623,14.087 cw(c21.623,14.012) 21.644,14.084 21.935,13.999 21.945,13.996 21.981,13.996 22.369,13.873 22.46,13.844 22.498,13.836 22.52,13.814 22.612,13.722 22.814,13.38 22.822,13.367 22.857,13.328 23.537,12.222 23.544,12.211 23.739,12.017 23.739,11.84 23.898,11.681 24.137,11.681 24.192,11.626 24.33,11.626 24.435,11.521 24.435,11.404 24.673,11.166 24.923,11.166 25.258,11.501 25.258,11.506 25.335,11.584 v4(25.335,11.645)
  Bot Sig/Pwr w0.075: v2(9.99,10.47) 10.009,10.45 J2.23@10.055,10.45
ADS_B_DR_GAP: GAP1.D3 U9.13 | length 29.7
  GND1 w0.075: v3(16.151,6.322) 16.151,6.099 16.263,5.987 16.263,5.924 16.362,5.826 ccw(c16.415,5.879) 16.409,5.804 16.461,5.801 ccw(c16.476,6.012) 16.626,5.862 16.666,5.902 cw(c16.719,5.849) 16.719,5.924 16.841,5.924 17.313,6.397 17.647,6.397 17.681,6.363 18.01,6.363 18.142,6.494 18.47,6.494 18.619,6.643 18.619,6.829 18.883,7.093 v1(19.096,7.093) ; v3(26.159,11.15) v1(26.254,11.057)
  Sig1 w0.075: v4(12.82,11.964) 12.82,11.932 13.016,11.736 13.016,11.22 13.621,10.616 13.907,10.616 14.347,10.175 14.853,10.175 15.175,9.853 15.175,9.779 15.51,9.444 15.51,9.212 15.883,8.839 16.038,8.839 16.082,8.795 16.082,8.455 16.159,8.377 16.159,6.33 v3(16.151,6.322) ; v4(25.852,11.24) 25.913,11.24 25.979,11.174 26.135,11.174 v3(26.159,11.15)
  Pwr w0.075: v4(12.82,11.964) 12.82,12.288 12.82,12.317 12.84,12.339 13.505,13.076 cw(c13.7,12.9) 13.59,13.138 13.664,13.173 cw(c13.695,13.104) 13.695,13.179 14.846,13.179 16.124,11.901 16.857,11.901 16.866,11.892 17.207,11.892 17.829,12.513 18.448,12.513 18.483,12.549 18.581,12.549 18.605,12.573 18.711,12.573 18.817,12.679 19.005,12.679 19.316,12.991 20.044,12.991 20.848,12.186 20.848,11.428 21.129,11.148 21.129,10.23 21.56,9.799 22.312,9.799 22.315,9.797 22.491,9.797 23.294,10.6 24.854,10.6 25.266,11.012 25.327,11.012 25.555,11.24 v4(25.852,11.24)
CS_nRF_GAP: GAP1.H1 U5.K3 | length 14.9
  Top Sig/Pwr w0.075: U5.K3@12.9,4.625 v1(12.912,4.635) v1(12.912,4.635) ; v1@20.464,4.586 20.474,4.595 20.474,5.188 20.362,5.299 20.362,6.216 20.546,6.4 GAP1.H1@20.575,6.4 ; v1(21.225,3.825) 21.228,3.828 21.945,3.828 v1(21.948,3.83)
  GND1 w0.075: v1(12.912,4.635) 12.936,4.612 13.025,4.612 13.048,4.588 13.619,4.588 13.625,4.582 14.672,4.582 15.277,3.977 15.609,3.977 15.808,3.778 15.808,3.508 v3(15.8,3.5) ; v1(20.474,4.579) 20.497,4.555 20.682,4.555 20.884,4.353 20.884,4.148 21.206,3.825 v1(21.225,3.825) ; v1(21.948,3.83) 21.982,3.83 22.088,3.724 22.226,3.724 v3(22.25,3.7)
  Sig2 w0.075: v4(15.778,3.63) 15.821,3.587 15.821,3.438 16.022,3.236 17.233,3.236 17.239,3.242 19.266,3.242 19.293,3.216 19.79,3.216 20.198,3.623 21.538,3.623 21.583,3.668 21.962,3.668 v4(22.005,3.711)
  Sig1 w0.075: v4(15.778,3.63) 15.778,3.522 v3(15.8,3.5) ; v4(22.005,3.711) 22.01,3.705 22.245,3.705 v3(22.25,3.7)
CSI_CLK_N: GAP1.E7 J4.17 | length 9.1
  Top Sig/Pwr w0.125: GAP1.E7@19.525,8.5 19.531,8.494 v1(19.531,8.48)
  GND1 w0.125: v1(19.531,8.48) 19.531,8.489 19.611,8.57 v3(19.611,8.579)
  GND3 w0.125: v6(24.6,6.95) 24.762,6.95 v2(24.762,6.941)
  Sig1 w0.075: v4(19.525,8.488) 19.525,8.493 v3(19.611,8.579)
  Pwr w0.075: v4(19.525,8.488) cw(c18.95,8.488) 19.357,8.082 19.332,8.057 ccw(c19.386,8.005) 19.326,8.05 19.326,7.137 ccw(c20.087,7.137) 19.491,6.664 ccw(c20.087,7.137) 19.507,6.645 19.547,6.604 19.688,6.524 ccw(c19.992,7.06) 19.889,6.453 21.502,6.427 21.513,6.426 21.516,6.426 ; 21.516,6.426 cw(c21.609,5.098) 22.409,6.163 ; 22.425,6.15 ccw(c22.485,6.21) 22.485,6.125 22.67,6.125 ; 22.67,6.125 ccw(c22.672,6.687) 22.939,6.192 ccw(c22.672,6.687) 23.067,6.288 ccw(c23.014,6.341) 23.069,6.289 ccw(c22.797,6.545) 23.143,6.405 ccw(c22.661,6.599) 23.148,6.419 cw(c23.46,6.419) 23.174,6.542 ccw(c23.105,6.572) 23.18,6.567 ccw(c22.661,6.599) 23.181,6.6 cw(c23.673,6.599) 23.24,6.835 cw(c23.673,6.599) 23.325,6.948 23.397,7.02 cw(c23.65,6.769) 23.65,7.125 23.684,7.125 cw(c23.684,6.609) 23.926,7.065 cw(c23.684,6.609) 24.049,6.974 ; 24.05,6.975 ccw(c24.113,7.016) 24.059,6.964 24.173,6.85 ccw(c24.412,7.087) 24.228,6.805 ccw(c24.412,7.087) 24.328,6.761 ccw(c24.328,7.022) 24.512,6.837 v6@24.625,6.95
  Bot Sig/Pwr w0.125: v2@24.771,6.95 J4.17@25.455,6.95
CSI_CLK_P: GAP1.D7 J4.19 | length 9
  Top Sig/Pwr w0.125: GAP1.D7@19.175,8.5 19.181,8.494 v1(19.181,8.48)
  GND1 w0.125: v3(19.145,8.575) 19.145,8.555 19.166,8.533 19.166,8.494 v1(19.181,8.48)
  GND3 w0.075: v6(24.625,6.575) v2(24.775,6.575)
  Sig1 w0.075: v3(19.145,8.575) v4(19.161,8.395)
  Pwr w0.075: v4(19.161,8.395) 19.151,8.242 19.151,7.137 ccw(c20.087,7.137) 19.424,6.476 ccw(c19.478,6.529) 19.44,6.464 19.602,6.371 ccw(c19.992,7.06) 19.841,6.283 ccw(c19.992,7.06) 19.874,6.278 cw(c19.873,6.203) 19.875,6.278 21.719,6.248 21.732,6.248 ; 21.733,6.248 21.736,6.248 cw(c21.609,5.098) 22.294,6.03 ; 22.3,6.025 ccw(c22.481,6.206) 22.481,5.95 22.67,5.95 22.672,5.95 ccw(c22.672,6.687) 23.194,6.166 23.195,6.168 ccw(c22.797,6.545) 23.306,6.341 ccw(c22.661,6.599) 23.356,6.599 cw(c23.673,6.599) 23.449,6.824 23.522,6.897 cw(c23.65,6.769) 23.65,6.95 23.684,6.95 cw(c23.684,6.609) 23.925,6.85 24.05,6.725 ccw(c24.412,7.087) 24.412,6.575 v6(24.625,6.575)
  Bot Sig/Pwr w0.125: v2(24.775,6.575) 25.265,6.575 cw(c25.265,6.49) J4.19@25.325,6.55 ; J4.19@25.454,6.549 J4.19@25.455,6.55
CSI_D0_N: GAP1.C6 J4.23 | length 9.1
  GND3 w0.1: v6(24.725,5.7) v2(24.875,5.7)
  Sig1 w0.075: v3(18.751,8.213) 18.751,8.179 18.764,8.165 v4(18.857,8.14)
  Pwr w0.075: v4(18.857,8.14) 18.767,8.087 18.747,8.07 18.679,7.972 18.621,7.886 18.621,7.317 18.621,7.316 ccw(c19.989,7.319) 19.016,6.357 ; 19.017,6.356 ccw(c20.844,8.176) 20.956,5.6 23.753,5.6 ccw(c23.748,5.73) 23.878,5.73 23.878,5.778 cw(c23.951,5.778) 23.891,5.819 23.9,5.828 23.91,5.838 cw(c23.951,5.778) 23.946,5.851 23.957,5.851 cw(c23.951,5.75) 23.997,5.839 cw(c23.962,5.773) 24.037,5.777 ccw(c24.225,5.788) 24.225,5.6 24.341,5.6 24.594,5.6 ccw(c24.594,5.675) 24.647,5.622 v6(24.725,5.7)
  Bot Sig/Pwr w0.125: v2(24.875,5.7) 25.405,5.7 J4.23@25.455,5.75
  other v1: 18.88,8.15
CSI_D0_P: GAP1.B6 J4.25 | length 9.1
  GND1 w0.125: v3(18.35,8.225) 18.39,8.185 ccw(c18.475,8.271) v1(18.475,8.15)
  GND3 w0.075: v6@24.75,5.425 v2@24.9,5.425
  Sig1 w0.075: v3(18.35,8.225) ccw(c18.418,8.225) 18.37,8.177 v4(18.446,8.101)
  Pwr w0.075: v4(18.446,8.101) 18.446,7.323 18.446,7.321 ccw(c19.986,7.318) 18.709,6.458 ccw(c19.989,7.319) 18.89,6.235 ccw(c20.844,8.176) 20.96,5.425 24.69,5.425 cw(c24.69,5.34) v6(24.75,5.4)
  Bot Sig/Pwr w0.125: v2@24.9,5.425 24.914,5.411 25.139,5.411 25.15,5.4 25.405,5.4 J4.25@25.455,5.35
  other v2: 24.9,5.4
EXT_CHG/VUSB: C1.1 D4.1 J2.47 J2.48 J6.19 J6.20 R25.2 U3.E1 | length 53.7
  Top Sig/Pwr w0.5: v1(13.025,0.475) D4.1@13.025,0.485
  GND1 w0.2: v3(12.925,0.4) 13,0.475 v1(13.025,0.475)
  GND1 w0.4: v3(8.834,10.111) 8.863,10.082 8.897,10.082 8.962,10.018 v1(9.082,10.018)
  GND3 w0.2: v2(7.507,2.448) 7.645,2.448 7.646,2.447 v6(7.691,2.447) ; v2(7.553,2.824) 7.561,2.817 v6(7.691,2.817)
  GND3 w0.4: v6(17.062,1.163) 17.2,1.026 v2(17.2,0.975)
  Sig1 w0.4: v4(7.875,2.814) 7.89,2.814 7.422,3.282 7.422,3.901 7.422,4.003 7.2,4.225 7.2,9.055 ; 8.758,14.964 7.974,14.18 7.962,14.18 7.583,13.801 7.583,12.907 6.776,12.101 6.776,10.841 7.2,10.417 7.2,9.055 ; v3(8.834,10.111) 8.407,10.111 7.879,9.583 7.728,9.583 7.2,9.055
  Sig1 w0.5: 8.758,14.964 8.758,17.795 ; 12.9,1.712 12.9,1.149 12.926,1.124 v3@12.926,0.45
  Sig1 w0.6: v4(7.85,2.475) 7.875,2.5 v4(7.875,2.814) ; v4@7.95,2.775 8.775,2.775 9.025,2.525 9.625,2.525 11.021,1.129 12.111,1.129 12.219,1.237 12.425,1.237 12.9,1.712 13.22,2.032 13.227,2.032 13.697,2.502 13.739,2.502 14.013,2.775 14.737,2.775 15.039,2.474 15.536,2.474 15.551,2.489 16.149,2.489 17.149,1.489 v4(17.149,1.316)
  Sig1 w1.5: 8.758,17.795 10.775,19.812 10.775,24.85 11.721,25.796 17.018,25.796 17.851,24.963 17.851,23.769 J6.19@17.88,23.74 J6.20@17.88,21.2
  Pwr w0.2: v6(7.691,2.447) 7.795,2.447 7.823,2.475 v4(7.85,2.475) ; v6(7.691,2.817) 7.873,2.817 v4(7.875,2.814) ; v6(17.062,1.163) 17.062,1.202 17.149,1.289 v4(17.149,1.316)
  Bot Sig/Pwr w0.2: J2.47@7.345,2.85 7.527,2.85 v2(7.553,2.824) ; J2.48@7.355,2.44 J2.48@7.345,2.45 7.505,2.45 v2(7.507,2.448) ; C1.1@17.052,1.05 17.127,0.975 v2(17.2,0.975) v2@17.262,1.037 ; 17.655,1.037 17.707,1.037 17.945,1.275 U3.E1@17.95,1.275
  Bot Sig/Pwr w0.4: v2@17.262,1.037 17.655,1.037
EXT_RX_SPI: GAP1.H2 U5.J3 | length 15.7
  Top Sig/Pwr w0.075: v1(12.549,4.63) 12.549,4.626 U5.J3@12.55,4.625 ; v1(20.575,6.128) 20.603,6.128 20.862,5.868 20.862,5.345 20.925,5.283 v1(20.925,4.726) ; v1@21.172,4.153 21.185,4.165 21.914,4.165 22.17,3.909 22.17,3.707 22.133,3.67 22.133,3.47 v1(22.121,3.457)
  GND1 w0.075: v1(12.549,4.63) 12.581,4.63 12.788,4.423 13.521,4.423 13.53,4.432 14.61,4.432 14.944,4.098 14.944,4.025 15.456,3.513 v3(15.456,3.498) ; v1(20.549,6.724) 20.549,6.501 20.613,6.438 20.613,6.2 20.575,6.162 v1(20.575,6.128) ; v1(20.925,4.726) 21.167,4.484 v1(21.167,4.165) ; v3(22.026,3.355) 22.026,3.359 22.121,3.453 v1(22.121,3.457)
  Sig2 w0.075: v4(15.381,3.618) 15.381,3.557 15.47,3.468 15.47,3.356 15.74,3.086 17.296,3.086 17.301,3.092 19.204,3.092 19.231,3.066 19.853,3.066 20.26,3.473 21.563,3.473 21.613,3.423 21.781,3.423 21.819,3.386 21.939,3.386 22.07,3.255 v4(22.13,3.255)
  Sig1 w0.075: v4(15.381,3.618) 15.381,3.573 v3(15.456,3.498) ; v3(22.026,3.355) 22.126,3.255 v4(22.13,3.255)
EXTUSB_N: J1.2 U19.A2 | length 2.8
  Top Sig/Pwr w0.156: v1(15.957,4.63) 15.965,4.638 15.965,4.651 15.967,4.652 15.967,4.742 U19.A2@15.975,4.75 ; v1(17.276,3.772) 17.276,4.076 J1.2@17.3,4.1
  GND1 w0.381: v1(15.957,4.63) 16.22,4.63 16.343,4.753 v3(16.343,4.814) ; v1(17.276,3.772) 17.276,4.378 v3(17.291,4.394)
  Sig1 w0.079: v3(16.343,4.814) 16.343,4.807 16.375,4.775 v4(16.468,4.775) ; v4(17.235,4.53) 17.235,4.45 v3(17.291,4.394)
  Pwr w0.079: v4(16.468,4.775) 16.496,4.747 17.072,4.747 17.235,4.584 v4(17.235,4.53)
EXTUSB_P: J1.3 U19.A1 | length 2.9